# Altium PCB carrier_board.PcbDoc (part 12 of 18)
Units mm, origin at the board's own origin, x right, y up, seen from the top; angles counter-clockwise.
Board outline 146 x 102 mm, 20 copper layers (F.Cu, F.Mask, B.Cu, B.Mask, In1.Cu, F.SilkS, In2.Cu, B.SilkS, F.Adhes, B.Adhes, F.Paste, B.Paste, Dwgs.User, Cmts.User, Eco1.User, Eco2.User, Edge.Cuts, Margin, B.CrtYd, F.CrtYd); 256 components, 384 nets, 1262 pads, 1024 vias.
Unrouted connection lines stored in the file: 117.
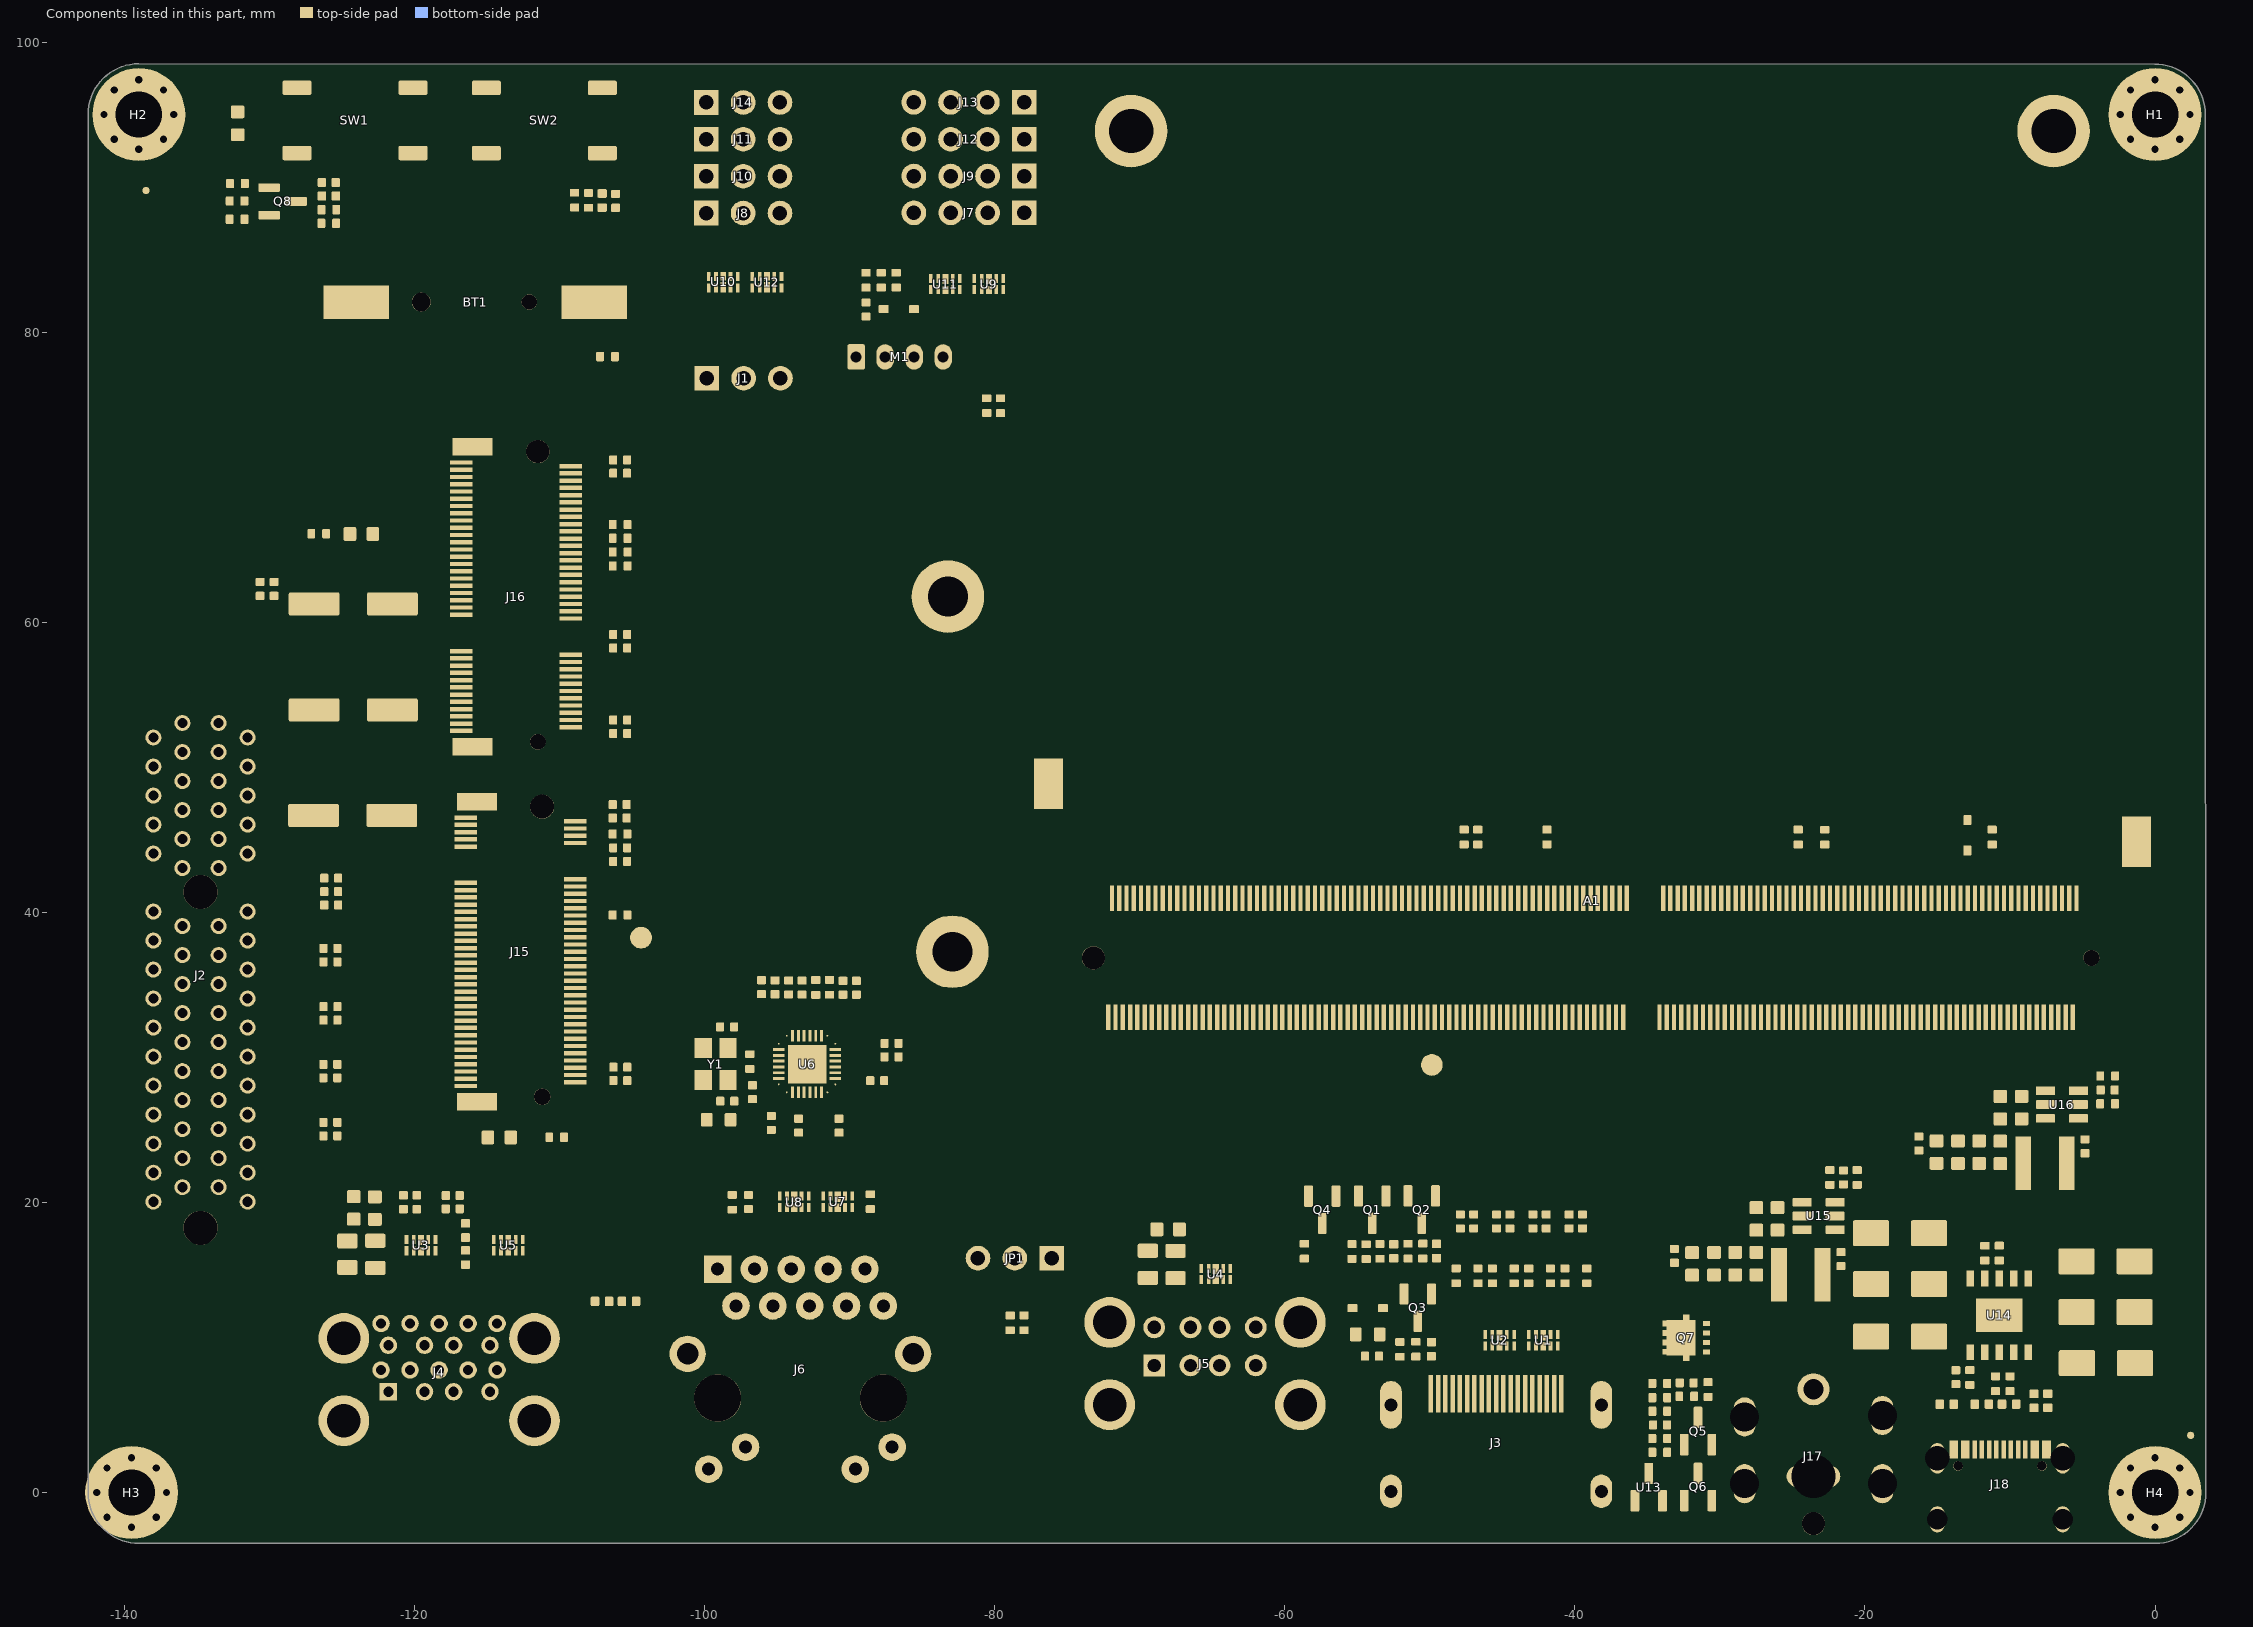
[diagram p22: the components of this part, seen from the top]

## Polygon pours and split planes (outlines as drawn) (continued)
HSIO_11_TX+ on F.Cu "F.Cu-/LattePanda Module/HSIO_11_TX+-1" (solid, remove dead copper, pour order 31897): -58.667,29.651 -58.671,29.594 -58.685,29.554 -58.729,29.5 -58.743,29.488 -58.785,29.449 -58.832,29.391 -58.666,29.279 -58.47,29.241 -58.453,29.347 -58.451,29.422 -58.457,29.486 -58.466,29.651
USB_2_P7+ on F.Cu "F.Cu-/LattePanda Module/USB_2_P7+-2" (solid, remove dead copper, pour order 31485): -115.845,53.209 -116.153,53.188 -116.444,53.163 -116.78,53.16 -116.771,53.01 -115.995,52.954 -115.99,52.982 -115.978,53.003 -115.932,53.03 -115.846,53.039 -115.845,53.039
Net-(U15-BOOST) on F.Cu "F.Cu-Net-(U15-BOOST)-1" (solid, remove dead copper, pour order 31391): -21.87,17.13 -21.864,17.059 -21.856,16.977 -21.859,16.894 -21.884,16.825 -21.909,16.801 -21.944,16.787 -21.66,16.569 -21.384,16.799 -21.417,16.809 -21.441,16.827 -21.472,16.883 -21.481,16.975 -21.475,17.067 -21.47,17.13
I2C4_SCL on F.Cu "F.Cu-/GPIO/I2C4_SCL-4" (solid, remove dead copper, pour order 31056): 23 vertices, not listed, extent -84.026,89.764 -82.864,90.926
Net-(D21-A2) on F.Cu "F.Cu-Net-(D21-A2)-4" (solid, remove dead copper, pour order 31143): 18 vertices, not listed, extent -128.101,91.859 -126.6,92.821
FAN_1_PWM on F.Cu "F.Cu-/Fan_Temp/FAN_1_PWM-2" (solid, remove dead copper, pour order 31572): -79.96,75.54 -80.045,75.546 -80.146,75.567 -80.211,75.593 -80.267,75.631 -80.295,75.662 -80.313,75.7 -80.551,75.44 -80.313,75.18 -80.274,75.242 -80.199,75.292 -80.083,75.328 -79.96,75.34
HSO+ on F.Cu "F.Cu-/Gigabit Ethernet/HSO+" (solid, remove dead copper, pour order 31537): -89.774,33.814 -89.722,33.897 -89.677,33.94 -89.621,33.979 -89.56,34.009 -89.491,34.03 -89.382,34.04 -89.535,34.321 -89.845,34.356 -89.836,34.249 -89.859,34.088 -89.922,33.876 -89.944,33.814
Net-(D26-A) on F.Cu "F.Cu-Net-(D26-A)-5" (solid, remove dead copper, pour order 31080): 19 vertices, not listed, extent -86.138,78.289 -84.962,79.653
DDC_SDA on F.Cu "F.Cu-/HDMI/DDC_SDA-3" (solid, remove dead copper, pour order 31264): -50.732,10.775 -50.727,10.853 -50.708,10.947 -50.682,11.024 -50.644,11.092 -50.609,11.131 -50.567,11.159 -50.546,11.168 -50.835,11.813 -51.124,11.168 -51.056,11.127 -51,11.049 -50.957,10.93 -50.938,10.775
SOC_UART2_TX on F.Cu "F.Cu-/GPIO/SOC_UART2_TX-4" (solid, remove dead copper, pour order 32133): -95.125,82.615 -95.125,82.63 -95.121,82.7 -95.106,82.728 -95.075,82.74 -95.2,83.053 -95.325,82.74 -95.304,82.735 -95.289,82.723 -95.275,82.678 -95.275,82.63 -95.275,82.615
Net-(Q5-G) on F.Cu "F.Cu-Net-(Q5-G)-3" (solid, remove dead copper, pour order 31470): -33.767,5.252 -33.777,5.11 -33.797,5.029 -33.831,4.956 -33.861,4.92 -33.899,4.894 -33.919,4.886 -33.65,4.661 -33.381,4.886 -33.438,4.924 -33.48,4.997 -33.506,5.112 -33.513,5.252
CON_USB2_D_P on F.Cu "F.Cu-/USB2.0&USB3.0/CON_USB2_D_P-4" (solid, remove dead copper, pour order 32025): -65.279,14.242 -65.279,14.248 -65.27,14.322 -65.247,14.354 -65.202,14.367 -65.25,14.681 -65.375,14.697 -65.387,14.558 -65.417,14.423 -65.439,14.326 -65.449,14.242
I2C3_SCL on F.Cu "F.Cu-/GPIO/I2C3_SCL-6" (solid, remove dead copper, pour order 32138): -82.825,83.27 -82.825,83.285 -82.821,83.355 -82.806,83.383 -82.775,83.395 -82.9,83.708 -83.025,83.395 -83.004,83.39 -82.989,83.378 -82.975,83.333 -82.975,83.285 -82.975,83.27
DDC_SCL on F.Cu "F.Cu-/HDMI/DDC_SCL-6" (solid, remove dead copper, pour order 31594): -50.685,17.7 -50.685,17.676 -50.686,17.59 -50.696,17.493 -50.726,17.409 -50.751,17.379 -50.786,17.36 -50.485,17.159 -50.249,17.42 -50.289,17.426 -50.324,17.44 -50.379,17.492 -50.417,17.577 -50.435,17.687 -50.435,17.7
+15V on F.Cu "F.Cu-+15V-5" (solid, remove dead copper, pour order 31890): -12.85,7.336 -12.855,7.235 -12.867,7.165 -12.88,7.12 -12.916,6.979 -12.72,6.939 -12.524,6.979 -12.563,7.093 -12.593,7.144 -12.633,7.219 -12.645,7.269 -12.65,7.336
+15V on F.Cu "F.Cu-+15V-4" (solid, remove dead copper, pour order 31715): -12.649,7.011 -12.649,7.046 -12.638,7.085 -12.617,7.121 -12.584,7.153 -12.546,7.174 -12.497,7.188 -12.49,7.19 -12.771,7.421 -13.015,7.166 -12.947,7.144 -12.882,7.084 -12.824,6.982 -12.791,6.869
GND on F.Cu "F.Cu-GND-189" (solid, remove dead copper, pour order 31712): -83.25,81.944 -83.244,82.093 -83.224,82.205 -83.224,82.207 -83.204,82.301 -83.4,82.341 -83.596,82.301 -83.576,82.207 -83.556,82.094 -83.55,81.944
Net-(D9-K) on F.Cu "F.Cu-Net-(D9-K)-1" (solid, remove dead copper, pour order 31238): 17 vertices, not listed, extent -115.055,24.278 -114.132,25.178
DDC_SDA on F.Cu "F.Cu-/HDMI/DDC_SDA-2" (solid, remove dead copper, pour order 31326): -48.533,8.255 -48.531,8.227 -48.531,8.148 -48.546,8.117 -48.58,8.105 -48.43,6.804 -48.28,8.105 -48.303,8.11 -48.319,8.122 -48.332,8.167 -48.329,8.227 -48.327,8.255
GND on F.Cu "F.Cu-GND-188" (solid, remove dead copper, pour order 31802): -62.815,41.664 -62.81,41.745 -62.798,41.802 -62.774,41.864 -62.748,41.928 -62.724,42.021 -62.92,42.061 -63.116,42.021 -63.076,41.893 -63.06,41.861 -63.029,41.783 -63.015,41.664
GND on F.Cu "F.Cu-GND-187" (solid, remove dead copper, pour order 31744): -116.166,53.91 -116.083,53.905 -116.023,53.893 -115.964,53.871 -115.9,53.847 -115.809,53.824 -115.769,54.02 -115.809,54.216 -115.934,54.176 -115.97,54.158 -116.047,54.124 -116.166,54.11
TMDS_CK+ on F.Cu "F.Cu-/HDMI/TMDS_CK+-7" (solid, remove dead copper, pour order 32096): -45.793,10.547 -45.788,10.515 -45.78,10.454 -45.79,10.431 -45.815,10.422 -45.69,10.109 -45.565,10.422 -45.585,10.427 -45.596,10.44 -45.599,10.482 -45.592,10.515 -45.587,10.547
CON_USB4_SSTX_N on F.Cu "F.Cu-/USB2.0&USB3.0/CON_USB4_SSTX_N-5" (solid, remove dead copper, pour order 31210): 18 vertices, not listed, extent -121.13,11.533 -120.183,12.48
GND on F.Cu "F.Cu-GND-186" (solid, remove dead copper, pour order 31170): 20 vertices, not listed, extent -118.301,7.862 -117.254,8.949
Net-(U6-CKXTAL1) on F.Cu "F.Cu-Net-(U6-CKXTAL1)-5" (solid, remove dead copper, pour order 31448): -97.463,31.704 -97.564,31.833 -97.613,31.922 -97.654,32.018 -97.677,32.099 -97.686,32.179 -97.685,32.216 -97.966,32.1 -98.051,31.79 -97.945,31.79 -97.813,31.753 -97.667,31.675 -97.569,31.598
I2C5_SCL on F.Cu "F.Cu-/GPIO/I2C5_SCL-4" (solid, remove dead copper, pour order 31041): 18 vertices, not listed, extent -86.918,90.053 -85.569,91.467
SOC_UART0_TX on F.Cu "F.Cu-/GPIO/SOC_UART0_TX-4" (solid, remove dead copper, pour order 32126): -96.625,82.615 -96.625,82.63 -96.621,82.7 -96.606,82.728 -96.575,82.74 -96.7,83.053 -96.825,82.74 -96.804,82.735 -96.789,82.723 -96.775,82.678 -96.775,82.63 -96.775,82.615
CON_USB1_D_N on F.Cu "F.Cu-/USB2.0&USB3.0/CON_USB1_D_N-3" (solid, remove dead copper, pour order 32053): -64.051,15.017 -64.067,15.131 -64.083,15.198 -64.113,15.333 -64.125,15.472 -64.25,15.456 -64.298,15.142 -64.269,15.138 -64.248,15.125 -64.226,15.083 -64.221,15.023 -64.221,15.017
HSIO_3_TX+ on F.Cu "F.Cu-/LattePanda Module/HSIO_3_TX+-2" (solid, remove dead copper, pour order 31971): -64.466,38.797 -64.457,38.959 -64.451,39.058 -64.47,39.199 -64.666,39.161 -64.832,39.049 -64.766,38.977 -64.723,38.948 -64.689,38.924 -64.661,38.896 -64.643,38.856 -64.636,38.797
GND on F.Cu "F.Cu-GND-185" (solid, remove dead copper, pour order 31344): -42.83,5.355 -42.832,5.381 -42.831,5.461 -42.815,5.492 -42.78,5.505 -42.93,6.806 -43.08,5.505 -43.057,5.5 -43.041,5.488 -43.027,5.443 -43.028,5.381 -43.03,5.355
TMDS_D2+ on F.Cu "F.Cu-/HDMI/TMDS_D2+-7" (solid, remove dead copper, pour order 32086): -41.077,9.673 -41.082,9.705 -41.09,9.766 -41.08,9.789 -41.055,9.797 -41.18,10.111 -41.305,9.797 -41.285,9.793 -41.274,9.78 -41.271,9.738 -41.278,9.705 -41.283,9.673
Net-(D11-A2) on F.Cu "F.Cu-Net-(D11-A2)-3" (solid, remove dead copper, pour order 31719): -11.04,3.725 -11.038,3.699 -11.039,3.619 -11.055,3.588 -11.09,3.575 -10.94,2.954 -10.79,3.575 -10.813,3.58 -10.829,3.592 -10.843,3.637 -10.842,3.699 -10.84,3.725
Net-(Q4-D) on F.Cu "F.Cu-Net-(Q4-D)-8" (solid, remove dead copper, pour order 31735): -43.79,15.538 -43.651,15.449 -43.572,15.381 -43.508,15.309 -43.483,15.266 -43.469,15.225 -43.185,15.449 -43.422,15.71 -43.449,15.641 -43.48,15.588 -43.511,15.554 -43.542,15.536 -43.584,15.538
MDI2+ on F.Cu "F.Cu-/Gigabit Ethernet/MDI2+-1" (solid, remove dead copper, pour order 32115): -92.186,27.107 -92.205,27.258 -92.228,27.419 -92.235,27.6 -92.335,27.591 -92.361,27.19 -92.338,27.188 -92.322,27.178 -92.305,27.14 -92.302,27.109 -92.302,27.107
{\P\W\R\_\L\E\D\}\{\s\l\a\s\h\}\{PSON} on F.Cu "F.Cu-/~{PWR_LED}{slash}~{PSON}-5" (solid, remove dead copper, pour order 31635): -58.55,15.59 -58.544,15.66 -58.525,15.743 -58.499,15.803 -58.462,15.852 -58.429,15.877 -58.39,15.891 -58.38,15.893 -58.65,16.131 -58.92,15.893 -58.855,15.866 -58.803,15.807 -58.765,15.709 -58.75,15.59
+3V3 on F.Cu "F.Cu-+3V3-77" (solid, remove dead copper, pour order 31565): -91.975,35.23 -91.881,35.223 -91.77,35.199 -91.709,35.173 -91.658,35.137 -91.622,35.08 -91.384,35.34 -91.622,35.599 -91.661,35.534 -91.735,35.482 -91.85,35.444 -91.975,35.43
+5V on F.Cu "F.Cu-+5V-12" (solid, remove dead copper, pour order 31182): 20 vertices, not listed, extent -69.762,16.666 -68.763,17.642
SOC_UART2_TX on F.Cu "F.Cu-/GPIO/SOC_UART2_TX-3" (solid, remove dead copper, pour order 32012): -95.275,82.438 -95.28,82.328 -95.293,82.253 -95.302,82.218 -95.332,82.091 -95.136,82.051 -94.97,82.163 -95.051,82.259 -95.105,82.326 -95.12,82.372 -95.125,82.438
+3V3 on F.Cu "F.Cu-+3V3-76" (solid, remove dead copper, pour order 31827): -53.12,18.996 -53.125,18.918 -53.137,18.862 -53.163,18.797 -53.191,18.733 -53.216,18.639 -53.02,18.599 -52.824,18.639 -52.865,18.771 -52.877,18.797 -52.907,18.876 -52.92,18.996
+3V3 on F.Cu "F.Cu-+3V3-75" (solid, remove dead copper, pour order 31366): -106.49,28.99 -106.485,28.91 -106.478,28.814 -106.482,28.716 -106.508,28.63 -106.534,28.596 -106.57,28.57 -106.29,28.399 -106.01,28.57 -106.064,28.617 -106.094,28.693 -106.102,28.808 -106.095,28.91 -106.09,28.99
GND on F.Cu "F.Cu-GND-184" (solid, remove dead copper, pour order 31741): -32.209,34.369 -32.145,34.427 -32.093,34.461 -32.039,34.488 -31.979,34.516 -31.899,34.564 -32.009,34.731 -32.176,34.841 -32.235,34.727 -32.248,34.684 -32.278,34.605 -32.351,34.511
VPullup on F.Cu "F.Cu-VPullup-7" (solid, remove dead copper, pour order 31612): -13.49,46.28 -13.429,46.275 -13.356,46.256 -13.298,46.231 -13.248,46.193 -13.222,46.16 -13.207,46.119 -13.204,46.094 -12.939,46.36 -13.192,46.644 -13.215,46.581 -13.273,46.532 -13.37,46.495 -13.49,46.48
CON_USB3_SSRX_N on F.Cu "F.Cu-/USB2.0&USB3.0/CON_USB3_SSRX_N-4" (solid, remove dead copper, pour order 32060): -114.229,17.107 -114.213,16.994 -114.197,16.927 -114.167,16.792 -114.155,16.653 -114.03,16.669 -113.982,16.983 -114.011,16.987 -114.032,17 -114.054,17.042 -114.059,17.102 -114.059,17.107
GND on F.Cu "F.Cu-GND-183" (solid, remove dead copper, pour order 31790): -11.065,33.794 -11.06,33.875 -11.048,33.932 -11.024,33.994 -10.998,34.058 -10.974,34.151 -11.17,34.191 -11.366,34.151 -11.326,34.023 -11.31,33.991 -11.279,33.913 -11.265,33.794
LED2_ACT on F.Cu "F.Cu-/Gigabit Ethernet/LED2_ACT" (solid, remove dead copper, pour order 32019): -95.839,31.015 -95.902,31.01 -95.949,30.998 -96.018,30.958 -96.079,30.921 -96.173,30.89 -96.135,30.694 -95.967,30.583 -95.936,30.659 -95.93,30.747 -95.928,30.794 -95.917,30.831 -95.891,30.856 -95.839,30.865
+3V3 on F.Cu "F.Cu-+3V3-74" (solid, remove dead copper, pour order 31862): -23.975,29.52 -23.917,29.572 -23.868,29.603 -23.804,29.63 -23.74,29.656 -23.655,29.705 -23.765,29.872 -23.932,29.982 -23.997,29.86 -24.007,29.833 -24.041,29.755 -24.117,29.662
REFCLK2- on F.Cu "F.Cu-/LattePanda Module/REFCLK2--2" (solid, remove dead copper, pour order 31226): 20 vertices, not listed, extent -131.607,37.943 -130.762,38.863
+12VA on F.Cu "F.Cu-+12VA-1" (solid, remove dead copper, pour order 31035): 22 vertices, not listed, extent -127.845,61.259 -126.228,62.56
GND on F.Cu "F.Cu-GND-182" (solid, remove dead copper, pour order 31798): -64.315,41.674 -64.31,41.755 -64.298,41.812 -64.274,41.874 -64.248,41.938 -64.224,42.031 -64.42,42.071 -64.616,42.031 -64.576,41.903 -64.56,41.871 -64.529,41.793 -64.515,41.674
GND on F.Cu "F.Cu-GND-181" (solid, remove dead copper, pour order 32164): 19 vertices, not listed, extent -16.116,42.34 -15.815,42.482
Net-(D11-A2) on F.Cu "F.Cu-Net-(D11-A2)-2" (solid, remove dead copper, pour order 31608): -10.435,6.697 -10.484,6.638 -10.62,6.484 -10.692,6.425 -10.758,6.399 -10.556,6.089 -10.26,6.262 -10.297,6.286 -10.324,6.314 -10.349,6.38 -10.343,6.459 -10.304,6.541 -10.293,6.555
CON_USB3_SSTX_N on F.Cu "F.Cu-/USB2.0&USB3.0/CON_USB3_SSTX_N-5" (solid, remove dead copper, pour order 31956): -120.249,16.173 -120.258,16.011 -120.264,15.912 -120.245,15.771 -120.049,15.809 -119.883,15.921 -119.949,15.993 -119.992,16.022 -120.026,16.046 -120.054,16.074 -120.072,16.114 -120.079,16.173
GND on F.Cu "F.Cu-GND-180" (solid, remove dead copper, pour order 31809): -15.566,34.18 -15.488,34.175 -15.432,34.163 -15.367,34.137 -15.303,34.109 -15.209,34.084 -15.169,34.28 -15.209,34.476 -15.341,34.435 -15.367,34.423 -15.446,34.393 -15.566,34.38
HPD on F.Cu "F.Cu-/HDMI/HPD-5" (solid, remove dead copper, pour order 31399): -50.234,8.123 -50.153,8.014 -50.098,7.874 -50.066,7.685 -50.058,7.407 -50.069,7.075 -50.08,6.797 -49.929,6.804 -49.978,8.105 -49.995,8.123 -50.017,8.192 -50.035,8.255 -50.058,8.299
CON_USB3_D_N on F.Cu "F.Cu-/USB2.0&USB3.0/CON_USB3_D_N-4" (solid, remove dead copper, pour order 31406): -105.919,12.632 -105.882,12.711 -105.846,12.754 -105.799,12.794 -105.744,12.826 -105.682,12.85 -105.62,12.862 -105.552,12.864 -105.536,12.862 -105.695,13.181 -105.99,13.258 -105.991,13.119 -106.027,12.901 -106.062,12.747 -106.089,12.632
GbE_PCIe_RX+ on F.Cu "F.Cu-/Gigabit Ethernet/GbE_PCIe_RX+-2" (solid, remove dead copper, pour order 31929): -89.774,38.277 -89.769,38.328 -89.756,38.365 -89.712,38.411 -89.687,38.428 -89.633,38.466 -89.578,38.529 -89.744,38.641 -89.94,38.679 -89.956,38.574 -89.958,38.5 -89.953,38.439 -89.944,38.277
GND on F.Cu "F.Cu-GND-179" (solid, remove dead copper, pour order 31842): -98.825,32.884 -98.82,32.962 -98.808,33.018 -98.782,33.083 -98.754,33.147 -98.729,33.241 -98.925,33.281 -99.121,33.241 -99.08,33.109 -99.068,33.083 -99.038,33.004 -99.025,32.884
HSIO_1_TX- on F.Cu "F.Cu-/LattePanda Module/HSIO_1_TX--2" (solid, remove dead copper, pour order 31906): -115.793,19.799 -115.742,19.794 -115.705,19.781 -115.659,19.737 -115.642,19.712 -115.604,19.658 -115.541,19.603 -115.429,19.769 -115.391,19.965 -115.496,19.981 -115.57,19.983 -115.631,19.978 -115.793,19.969
CON_USB3_SSTX_P on F.Cu "F.Cu-/USB2.0&USB3.0/CON_USB3_SSTX_P-5" (solid, remove dead copper, pour order 31515): -120.353,19.027 -120.425,19.251 -120.453,19.381 -120.461,19.504 -120.452,19.568 -120.762,19.533 -120.915,19.252 -120.792,19.239 -120.676,19.191 -120.578,19.112 -120.523,19.027
Net-(U14-VDD) on F.Cu "F.Cu-Net-(U14-VDD)-3" (solid, remove dead copper, pour order 31598): -12.865,8.98 -12.873,8.881 -12.886,8.824 -12.908,8.77 -12.936,8.731 -12.972,8.702 -13.027,8.686 -12.77,8.439 -12.487,8.667 -12.544,8.695 -12.584,8.755 -12.609,8.856 -12.615,8.98
TMDS_D0- on F.Cu "F.Cu-/HDMI/TMDS_D0--7" (solid, remove dead copper, pour order 32085): -44.587,10.448 -44.592,10.48 -44.6,10.541 -44.59,10.564 -44.565,10.572 -44.69,10.886 -44.815,10.572 -44.795,10.568 -44.784,10.555 -44.781,10.513 -44.788,10.48 -44.793,10.448
GND on F.Cu "F.Cu-GND-178" (solid, remove dead copper, pour order 31888): -47.065,33.644 -47.06,33.731 -47.048,33.792 -47.028,33.849 -46.984,34.001 -47.18,34.041 -47.376,34.001 -47.337,33.879 -47.315,33.839 -47.28,33.762 -47.265,33.644
HSIO_8_TX+ on F.Cu "F.Cu-/LattePanda Module/HSIO_8_TX+-2" (solid, remove dead copper, pour order 31896): -63.191,29.651 -63.196,29.594 -63.209,29.554 -63.254,29.5 -63.267,29.488 -63.31,29.449 -63.356,29.391 -63.19,29.279 -62.994,29.241 -62.978,29.347 -62.976,29.422 -62.981,29.486 -62.99,29.651
TMDS_CK- on F.Cu "F.Cu-/HDMI/TMDS_CK--7" (solid, remove dead copper, pour order 31609): -47.485,17.779 -47.526,17.879 -47.567,18.002 -47.592,18.133 -47.593,18.197 -47.584,18.258 -47.894,18.211 -48.038,17.93 -47.96,17.929 -47.89,17.918 -47.829,17.9 -47.778,17.874 -47.737,17.843 -47.707,17.808 -47.69,17.779
GND on F.Cu "F.Cu-GND-177" (solid, remove dead copper, pour order 31352): -125.06,41.76 -125.065,41.84 -125.072,41.936 -125.068,42.034 -125.042,42.12 -125.016,42.154 -124.98,42.18 -125.26,42.351 -125.54,42.18 -125.486,42.133 -125.455,42.057 -125.448,41.942 -125.455,41.84 -125.46,41.76
Net-(U13-REF) on F.Cu "F.Cu-Net-(U13-REF)-3" (solid, remove dead copper, pour order 31268): -34.06,0.473 -34.065,0.397 -34.083,0.306 -34.11,0.229 -34.148,0.159 -34.183,0.119 -34.225,0.089 -34.249,0.08 -33.96,-0.566 -33.671,0.08 -33.739,0.121 -33.796,0.199 -33.84,0.319 -33.86,0.473
Net-(U10-NC-Pad6) on F.Cu "F.Cu-Net-(U10-NC-Pad6)-1" (solid, remove dead copper, pour order 32109): -97.61,83.393 -97.615,83.424 -97.62,83.486 -97.611,83.508 -97.585,83.517 -97.71,83.831 -97.835,83.517 -97.815,83.513 -97.804,83.5 -97.8,83.457 -97.805,83.424 -97.81,83.393
GND on F.Cu "F.Cu-GND-176" (solid, remove dead copper, pour order 31757): -61.515,39.666 -61.52,39.585 -61.532,39.528 -61.556,39.466 -61.582,39.402 -61.606,39.309 -61.41,39.269 -61.214,39.309 -61.254,39.437 -61.27,39.469 -61.301,39.547 -61.315,39.666
+12V on F.Cu "F.Cu-+12V-10" (solid, remove dead copper, pour order 32073): -30.82,9.35 -30.82,9.366 -30.813,9.466 -30.79,9.508 -30.771,9.52 -30.745,9.525 -30.92,9.701 -31.095,9.525 -31.069,9.52 -31.049,9.507 -31.026,9.461 -31.02,9.366 -31.02,9.35
GND on F.Cu "F.Cu-GND-175" (solid, remove dead copper, pour order 31158): 20 vertices, not listed, extent -7.329,2.079 -6.369,3.255
PWR_EN on F.Cu "F.Cu-/PSU/PWR_EN-9" (solid, remove dead copper, pour order 31845): -24.28,20.664 -24.275,20.742 -24.263,20.798 -24.237,20.863 -24.209,20.927 -24.184,21.021 -24.38,21.061 -24.576,21.021 -24.535,20.889 -24.523,20.863 -24.493,20.784 -24.48,20.664
HPD on F.Cu "F.Cu-/HDMI/HPD-4" (solid, remove dead copper, pour order 31728): -49.966,8.208 -50.031,8.279 -50.069,8.335 -50.093,8.381 -50.169,8.511 -50.336,8.401 -50.446,8.234 -50.316,8.158 -50.239,8.114 -50.143,8.031
SOC_UART2_RX on F.Cu "F.Cu-/GPIO/SOC_UART2_RX-4" (solid, remove dead copper, pour order 32003): -84.064,79.735 -84.132,79.74 -84.183,79.752 -84.257,79.79 -84.322,79.826 -84.421,79.856 -84.461,79.66 -84.421,79.464 -84.305,79.503 -84.257,79.53 -84.182,79.569 -84.131,79.581 -84.064,79.585
+12V on F.Cu "F.Cu-+12V-9" (solid, remove dead copper, pour order 31830): -32.91,6.239 -32.915,6.161 -32.927,6.104 -32.953,6.04 -32.981,5.976 -33.006,5.882 -32.81,5.841 -32.614,5.882 -32.655,6.013 -32.667,6.04 -32.697,6.119 -32.71,6.239
SOC_UART2_TX on F.Cu "F.Cu-/GPIO/SOC_UART2_TX-2" (solid, remove dead copper, pour order 32136): -95.275,83.49 -95.275,83.475 -95.279,83.405 -95.294,83.377 -95.325,83.365 -95.2,83.052 -95.075,83.365 -95.096,83.37 -95.111,83.382 -95.125,83.427 -95.125,83.475 -95.125,83.49
I2C5_SCL on F.Cu "F.Cu-/GPIO/I2C5_SCL-3" (solid, remove dead copper, pour order 32117): -84.475,83.37 -84.475,83.355 -84.479,83.285 -84.494,83.257 -84.525,83.245 -84.4,82.932 -84.275,83.245 -84.296,83.25 -84.311,83.262 -84.325,83.307 -84.325,83.355 -84.325,83.37
VDC on F.Cu "F.Cu-VDC-3" (solid, remove dead copper, pour order 30964): -23.99,18.75 -29.445,18.75 -29.445,21.035 -29.335,21.145 -25.875,21.145 -25.555,20.825 -25.555,19.365 -25.54,19.35 -23.99,19.35
CON_USB4_SSRX_P on F.Cu "F.Cu-/USB2.0&USB3.0/CON_USB4_SSRX_P-4" (solid, remove dead copper, pour order 31214): 18 vertices, not listed, extent -116.417,11.533 -115.47,12.48
Net-(U6-RSET) on F.Cu "F.Cu-Net-(U6-RSET)-1" (solid, remove dead copper, pour order 32154): -95.385,28.465 -95.354,28.467 -95.286,28.47 -95.256,28.461 -95.235,28.44 -94.884,28.54 -95.235,28.64 -95.267,28.613 -95.327,28.609 -95.354,28.612 -95.385,28.615
USB_2_P7- on F.Cu "F.Cu-/LattePanda Module/USB_2_P7--2" (solid, remove dead copper, pour order 31937): -104.447,49.321 -104.498,49.326 -104.535,49.339 -104.581,49.383 -104.598,49.408 -104.636,49.462 -104.699,49.517 -104.811,49.351 -104.849,49.155 -104.744,49.139 -104.67,49.137 -104.609,49.142 -104.447,49.151
HSIO_2_RX- on F.Cu "F.Cu-/LattePanda Module/HSIO_2_RX--2" (solid, remove dead copper, pour order 31481): -115.545,38.229 -115.853,38.208 -116.144,38.183 -116.48,38.18 -116.471,38.03 -115.695,37.974 -115.69,38.002 -115.678,38.023 -115.632,38.05 -115.546,38.059 -115.545,38.059
+3V3 on F.Cu "F.Cu-+3V3-73" (solid, remove dead copper, pour order 31840): -88.48,27.147 -88.475,27.225 -88.463,27.281 -88.437,27.345 -88.409,27.41 -88.384,27.504 -88.58,27.544 -88.776,27.504 -88.735,27.372 -88.723,27.345 -88.693,27.267 -88.68,27.147
CON_USB4_SSTX_P on F.Cu "F.Cu-/USB2.0&USB3.0/CON_USB4_SSTX_P-5" (solid, remove dead copper, pour order 32050): -118.851,16.232 -118.867,16.346 -118.883,16.413 -118.913,16.548 -118.925,16.687 -119.05,16.671 -119.098,16.358 -119.069,16.353 -119.048,16.34 -119.026,16.298 -119.021,16.238 -119.021,16.232
CON_USB3_SSTX_N on F.Cu "F.Cu-/USB2.0&USB3.0/CON_USB3_SSTX_N-4" (solid, remove dead copper, pour order 32062): -120.249,17.107 -120.233,16.994 -120.217,16.927 -120.187,16.792 -120.175,16.653 -120.05,16.669 -120.002,16.983 -120.031,16.987 -120.052,17 -120.074,17.042 -120.079,17.102 -120.079,17.107
CON_USB2_D_N on F.Cu "F.Cu-/USB2.0&USB3.0/CON_USB2_D_N-4" (solid, remove dead copper, pour order 32032): -65.721,15.893 -65.721,15.887 -65.73,15.813 -65.753,15.781 -65.798,15.767 -65.75,15.454 -65.625,15.438 -65.613,15.577 -65.583,15.712 -65.561,15.809 -65.551,15.893
Net-(Q8-G) on F.Cu "F.Cu-Net-(Q8-G)-3" (solid, remove dead copper, pour order 31614): -131.938,88.476 -131.773,88.627 -131.674,88.693 -131.627,88.713 -131.584,88.72 -131.719,89.041 -131.99,89.107 -131.949,88.982 -131.942,88.843 -131.972,88.705 -131.998,88.645 -132.031,88.596 -132.044,88.582
DDI_B_DDC_SCL on F.Cu "F.Cu-/HDMI/DDI_B_DDC_SCL-2" (solid, remove dead copper, pour order 31626): -51.604,17.69 -51.61,17.615 -51.632,17.525 -51.658,17.469 -51.694,17.423 -51.727,17.4 -51.766,17.388 -51.77,17.387 -51.5,17.149 -51.23,17.387 -51.295,17.413 -51.345,17.473 -51.381,17.57 -51.396,17.69
DDI_B_TX3+ on F.Cu "F.Cu-/HDMI/DDI_B_TX3+" (solid, remove dead copper, pour order 31455): -47.383,19.683 -47.361,19.612 -47.294,19.37 -47.276,19.248 -47.284,19.142 -46.974,19.169 -46.816,19.45 -46.933,19.463 -47.039,19.511 -47.126,19.588 -47.157,19.635 -47.177,19.68 -47.178,19.683
PWR_EN on F.Cu "F.Cu-/PSU/PWR_EN-8" (solid, remove dead copper, pour order 31451): -7.648,28.297 -7.653,28.24 -7.67,28.17 -7.696,28.107 -7.734,28.052 -7.768,28.023 -7.81,28.003 -7.853,27.998 -7.558,27.697 -7.252,27.998 -7.322,28.016 -7.378,28.068 -7.423,28.158 -7.447,28.276 -7.448,28.297
GND on F.Cu "F.Cu-GND-174" (solid, remove dead copper, pour order 31672): -115.845,54.11 -115.871,54.108 -115.951,54.109 -115.982,54.125 -115.995,54.16 -116.771,54.01 -115.995,53.86 -115.99,53.883 -115.978,53.899 -115.933,53.913 -115.871,53.912 -115.845,53.91
HSI+ on F.Cu "F.Cu-/Gigabit Ethernet/HSI+-1" (solid, remove dead copper, pour order 31541): -88.095,30.278 -88.013,30.225 -87.969,30.18 -87.931,30.124 -87.9,30.062 -87.879,29.993 -87.87,29.885 -87.589,30.037 -87.553,30.348 -87.66,30.339 -87.82,30.362 -88.032,30.425 -88.095,30.448
CC2 on F.Cu "F.Cu-/PSU/CC2-5" (solid, remove dead copper, pour order 31880): -8.84,14.186 -8.845,14.113 -8.857,14.059 -8.888,13.99 -8.919,13.925 -8.946,13.829 -8.75,13.789 -8.554,13.829 -8.595,13.969 -8.601,13.984 -8.629,14.064 -8.64,14.186
+3V3 on F.Cu "F.Cu-+3V3-72" (solid, remove dead copper, pour order 31652): -107.995,28.88 -108.021,28.878 -108.101,28.879 -108.132,28.895 -108.145,28.93 -108.921,28.78 -108.145,28.63 -108.14,28.653 -108.128,28.669 -108.083,28.683 -108.021,28.682 -107.995,28.68
{\P\L\T\_\R\S\T\}\ on F.Cu "F.Cu-/~{PLT_RST}-8" (solid, remove dead copper, pour order 31990): -92.197,33.017 -92.145,33.062 -92.101,33.089 -92.022,33.115 -91.95,33.135 -91.859,33.184 -91.969,33.351 -92.136,33.461 -92.191,33.351 -92.205,33.298 -92.232,33.218 -92.259,33.174 -92.303,33.123
FAN_1_PWM on F.Cu "F.Cu-/Fan_Temp/FAN_1_PWM-1" (solid, remove dead copper, pour order 32005): -78.836,74.574 -78.726,74.458 -78.648,74.347 -78.616,74.299 -78.449,74.409 -78.411,74.606 -78.503,74.621 -78.597,74.642 -78.641,74.668 -78.694,74.716
CON_USB3_SSRX_N on F.Cu "F.Cu-/USB2.0&USB3.0/CON_USB3_SSRX_N-3" (solid, remove dead copper, pour order 32043): -114.059,16.232 -114.059,16.238 -114.05,16.312 -114.027,16.344 -113.982,16.358 -114.03,16.671 -114.155,16.687 -114.167,16.548 -114.197,16.413 -114.219,16.316 -114.229,16.232
CON_USB3_SSTX_P on F.Cu "F.Cu-/USB2.0&USB3.0/CON_USB3_SSTX_P-4" (solid, remove dead copper, pour order 32067): -120.351,16.232 -120.367,16.346 -120.383,16.413 -120.413,16.548 -120.425,16.687 -120.55,16.671 -120.598,16.358 -120.569,16.353 -120.548,16.34 -120.526,16.298 -120.521,16.238 -120.521,16.232
PCIE30_TX3_N on F.Cu "F.Cu-/PCIe x4/PCIE30_TX3_N-1" (solid, remove dead copper, pour order 31550): -126.783,24.834 -126.701,24.78 -126.658,24.733 -126.619,24.677 -126.589,24.614 -126.569,24.545 -126.56,24.439 -126.279,24.59 -126.242,24.9 -126.348,24.891 -126.508,24.915 -126.716,24.979 -126.783,25.004
+12V on F.Cu "F.Cu-+12V-8" (solid, remove dead copper, pour order 31629): -33.1,7.662 -33.19,7.669 -33.296,7.694 -33.35,7.72 -33.393,7.755 -33.42,7.81 -33.641,7.522 -33.391,7.27 -33.367,7.342 -33.311,7.4 -33.219,7.443 -33.1,7.462
Net-(J6-PadL3) on F.Cu "F.Cu-Net-(J6-PadL3)-1" (solid, remove dead copper, pour order 31427): -98.461,18.988 -98.384,19.057 -98.284,19.129 -98.197,19.177 -98.105,19.213 -98.041,19.227 -97.978,19.23 -98.089,19.501 -98.41,19.562 -98.408,19.469 -98.442,19.357 -98.518,19.229 -98.602,19.129
PCIE30_TX1_N on F.Cu "F.Cu-/PCIe x4/PCIE30_TX1_N-1" (solid, remove dead copper, pour order 31194): 21 vertices, not listed, extent -138.001,31.511 -136.961,32.507
Net-(U13-K) on F.Cu "F.Cu-Net-(U13-K)-3" (solid, remove dead copper, pour order 31496): -34.533,6.933 -34.531,7.022 -34.515,7.129 -34.499,7.181 -34.476,7.226 -34.443,7.263 -34.4,7.286 -34.66,7.524 -34.92,7.286 -34.861,7.248 -34.819,7.177 -34.793,7.065 -34.787,6.933
VPullup on F.Cu "F.Cu-VPullup-6" (solid, remove dead copper, pour order 31576): -41.33,45.8 -41.415,45.806 -41.516,45.827 -41.581,45.853 -41.637,45.891 -41.665,45.922 -41.683,45.96 -41.921,45.7 -41.683,45.44 -41.644,45.502 -41.569,45.552 -41.453,45.588 -41.33,45.6
GND on F.Cu "F.Cu-GND-173" (solid, remove dead copper, pour order 31651): -117.395,38.93 -117.369,38.932 -117.289,38.931 -117.258,38.915 -117.245,38.88 -116.469,39.03 -117.245,39.18 -117.25,39.157 -117.262,39.141 -117.307,39.127 -117.369,39.128 -117.395,39.13
SOC_UART0_TX on F.Cu "F.Cu-/GPIO/SOC_UART0_TX-3" (solid, remove dead copper, pour order 31992): -96.625,84.634 -96.62,84.702 -96.608,84.753 -96.57,84.827 -96.534,84.892 -96.504,84.991 -96.7,85.031 -96.896,84.991 -96.857,84.875 -96.83,84.827 -96.791,84.752 -96.779,84.701 -96.775,84.634
HSIO_3_TX+ on F.Cu "F.Cu-/LattePanda Module/HSIO_3_TX+-1" (solid, remove dead copper, pour order 31531): -104.837,58.634 -105.019,58.57 -105.128,58.542 -105.237,58.524 -105.312,58.521 -105.378,58.53 -105.341,58.22 -105.06,58.069 -105.047,58.192 -104.999,58.31 -104.919,58.409 -104.837,58.464
GND on F.Cu "F.Cu-GND-172" (solid, remove dead copper, pour order 31296): -34.892,4.045 -34.821,4.129 -34.756,4.209 -34.682,4.284 -34.6,4.337 -34.556,4.351 -34.511,4.353 -34.609,4.663 -34.89,4.769 -34.895,4.676 -34.938,4.579 -35.022,4.472 -35.12,4.379 -35.175,4.328
I2C5_SDA on F.Cu "F.Cu-/GPIO/I2C5_SDA-2" (solid, remove dead copper, pour order 32143): -81.325,82.495 -81.325,82.51 -81.321,82.58 -81.306,82.608 -81.275,82.62 -81.4,82.933 -81.525,82.62 -81.504,82.615 -81.489,82.603 -81.475,82.558 -81.475,82.51 -81.475,82.495
GND on F.Cu "F.Cu-GND-171" (solid, remove dead copper, pour order 31354): -105.57,47.09 -105.565,47.01 -105.558,46.914 -105.562,46.816 -105.588,46.73 -105.614,46.696 -105.65,46.67 -105.37,46.499 -105.09,46.67 -105.144,46.717 -105.175,46.793 -105.182,46.908 -105.175,47.01 -105.17,47.09
CON_USB3_D_N on F.Cu "F.Cu-/USB2.0&USB3.0/CON_USB3_D_N-3" (solid, remove dead copper, pour order 31403): -106.089,13.728 -106.062,13.613 -106.005,13.35 -105.989,13.218 -105.99,13.102 -105.695,13.179 -105.536,13.498 -105.656,13.504 -105.766,13.546 -105.858,13.618 -105.891,13.662 -105.913,13.707 -105.919,13.728
GND on F.Cu "F.Cu-GND-170" (solid, remove dead copper, pour order 31705): -115.549,45.67 -115.589,45.662 -115.659,45.651 -115.685,45.657 -115.695,45.68 -116.471,45.53 -115.695,45.413 -115.69,45.437 -115.678,45.453 -115.632,45.469 -115.568,45.471 -115.541,45.47
Net-(J4B-VBUS2) on F.Cu "F.Cu-Net-(J4B-VBUS2)" (solid, remove dead copper, pour order 31107): 17 vertices, not listed, extent -122.919,9.381 -121.683,10.483
HSIO_3_TX- on F.Cu "F.Cu-/LattePanda Module/HSIO_3_TX--2" (solid, remove dead copper, pour order 31932): -64.194,38.797 -64.189,38.848 -64.176,38.885 -64.132,38.931 -64.107,38.948 -64.053,38.986 -63.998,39.049 -64.164,39.161 -64.36,39.199 -64.376,39.094 -64.378,39.02 -64.373,38.959 -64.364,38.797
TMDS_D1- on F.Cu "F.Cu-/HDMI/TMDS_D1--7" (solid, remove dead copper, pour order 31334): -43.533,8.255 -43.531,8.227 -43.531,8.148 -43.546,8.117 -43.58,8.105 -43.43,6.804 -43.28,8.105 -43.303,8.11 -43.319,8.122 -43.332,8.167 -43.329,8.227 -43.327,8.255
CON_USB2_D_N on F.Cu "F.Cu-/USB2.0&USB3.0/CON_USB2_D_N-3" (solid, remove dead copper, pour order 32031): -65.721,15.118 -65.721,15.112 -65.73,15.038 -65.753,15.006 -65.798,14.992 -65.75,14.679 -65.625,14.663 -65.613,14.802 -65.583,14.937 -65.561,15.034 -65.551,15.118
GND on F.Cu "F.Cu-GND-169" (solid, remove dead copper, pour order 31886): -62.065,34.384 -62.06,34.456 -62.048,34.508 -62.015,34.579 -61.982,34.644 -61.954,34.741 -62.15,34.781 -62.346,34.741 -62.302,34.589 -62.276,34.507 -62.265,34.384
Net-(D22-K) on F.Cu "F.Cu-Net-(D22-K)-1" (solid, remove dead copper, pour order 31595): -128.235,89.542 -128.245,89.468 -128.266,89.424 -128.298,89.381 -128.337,89.349 -128.383,89.324 -128.464,89.31 -128.144,89.009 -127.863,89.31 -127.932,89.328 -128.003,89.386 -128.074,89.49 -128.125,89.623 -128.129,89.648
GND on F.Cu "F.Cu-GND-168" (solid, remove dead copper, pour order 31687): -117.395,35.93 -117.369,35.932 -117.289,35.931 -117.258,35.915 -117.245,35.88 -116.469,36.03 -117.245,36.18 -117.25,36.157 -117.262,36.141 -117.307,36.127 -117.369,36.128 -117.395,36.13
CON_USB4_SSTX_P on F.Cu "F.Cu-/USB2.0&USB3.0/CON_USB4_SSTX_P-4" (solid, remove dead copper, pour order 32039): -119.021,17.882 -119.021,17.877 -119.03,17.803 -119.053,17.771 -119.098,17.758 -119.05,17.444 -118.925,17.428 -118.913,17.567 -118.883,17.702 -118.861,17.799 -118.851,17.882
GND on F.Cu "F.Cu-GND-167" (solid, remove dead copper, pour order 31683): -108.295,56.86 -108.321,56.858 -108.401,56.859 -108.432,56.875 -108.445,56.91 -109.221,56.76 -108.445,56.61 -108.44,56.633 -108.428,56.649 -108.383,56.663 -108.321,56.662 -108.295,56.66
+3V3 on F.Cu "F.Cu-+3V3-71" (solid, remove dead copper, pour order 31654): -107.995,32.38 -108.021,32.378 -108.101,32.379 -108.132,32.395 -108.145,32.43 -108.921,32.28 -108.145,32.13 -108.14,32.153 -108.128,32.169 -108.083,32.183 -108.021,32.182 -107.995,32.18
Net-(D10-A2) on F.Cu "F.Cu-Net-(D10-A2)-4" (solid, remove dead copper, pour order 31717): -10.34,2.185 -10.342,2.211 -10.341,2.291 -10.325,2.322 -10.29,2.335 -10.44,2.956 -10.59,2.335 -10.567,2.33 -10.551,2.318 -10.537,2.273 -10.538,2.211 -10.54,2.185
+3V3 on F.Cu "F.Cu-+3V3-70" (solid, remove dead copper, pour order 31620): -107.995,45.405 -108.035,45.398 -108.108,45.389 -108.134,45.4 -108.145,45.43 -108.921,45.28 -108.145,45.13 -108.14,45.152 -108.128,45.165 -108.085,45.171 -108.035,45.162 -107.995,45.155
GND on F.Cu "F.Cu-GND-166" (solid, remove dead copper, pour order 31707): -35.261,4.242 -35.16,4.167 -34.978,4.081 -34.876,4.049 -34.778,4.03 -34.706,4.026 -34.644,4.036 -34.625,4.042 -34.661,3.722 -34.93,3.594 -34.929,3.674 -34.932,3.843 -34.947,3.909 -34.978,3.959
GND on F.Cu "F.Cu-GND-165" (solid, remove dead copper, pour order 31844): -115.68,52.124 -115.675,52.202 -115.663,52.258 -115.637,52.323 -115.609,52.387 -115.584,52.481 -115.78,52.521 -115.976,52.481 -115.935,52.349 -115.923,52.323 -115.893,52.244 -115.88,52.124
{\C\L\K\R\E\Q\M\}\ on F.Cu "F.Cu-/M.2 E&M Key/~{CLKREQM}-1" (solid, remove dead copper, pour order 31673): -107.995,40.88 -108.021,40.878 -108.101,40.879 -108.132,40.895 -108.145,40.93 -108.921,40.78 -108.145,40.63 -108.14,40.653 -108.128,40.669 -108.083,40.683 -108.021,40.682 -107.995,40.68
5V_HDMI_VCC on F.Cu "F.Cu-5V_HDMI_VCC-1" (solid, remove dead copper, pour order 31222): -53.489,11.77 -53.494,11.659 -53.52,11.529 -53.548,11.467 -53.59,11.414 -53.646,11.373 -53.721,11.349 -53.758,11.346 -53.46,10.899 -53.06,10.848 -53.084,10.976 -53.078,11.152 -53.027,11.455 -52.995,11.626 -52.981,11.77
Net-(U16-FB) on F.Cu "F.Cu-Net-(U16-FB)-2" (solid, remove dead copper, pour order 31587): -3.88,27.39 -3.886,27.312 -3.905,27.219 -3.932,27.151 -3.969,27.092 -4.003,27.06 -4.044,27.038 -4.05,27.037 -3.79,26.799 -3.53,27.037 -3.59,27.076 -3.637,27.151 -3.67,27.269 -3.68,27.39
Net-(A1-{\B\I\O\S\_\S\E\L\}\)\ on F.Cu "F.Cu-Net-(A1-~{BIOS_SEL})-2" (solid, remove dead copper, pour order 31867): -39.039,38.671 -39.091,38.729 -39.122,38.778 -39.149,38.842 -39.175,38.906 -39.224,38.991 -39.391,38.881 -39.501,38.714 -39.379,38.649 -39.352,38.639 -39.274,38.605 -39.181,38.529
DDI_B_HPD on F.Cu "F.Cu-/HDMI/DDI_B_HPD-4" (solid, remove dead copper, pour order 31602): -55.485,17.668 -55.498,17.526 -55.523,17.45 -55.568,17.391 -55.596,17.374 -55.63,17.365 -55.36,17.126 -55.09,17.365 -55.124,17.374 -55.152,17.391 -55.196,17.448 -55.226,17.544 -55.235,17.668
Net-(J5-VBUS2) on F.Cu "F.Cu-Net-(J5-VBUS2)-1" (solid, remove dead copper, pour order 31044): -69.25,12.618 -69.255,12.478 -69.27,12.368 -69.291,12.291 -69.318,12.225 -69.4,12.097 -69.452,12.032 -69.624,11.799 -69,11.381 -68.376,11.799 -68.548,12.032 -68.637,12.149 -68.7,12.265 -68.737,12.411 -68.75,12.618
CON_USB3_SSTX_N on F.Cu "F.Cu-/USB2.0&USB3.0/CON_USB3_SSTX_N-3" (solid, remove dead copper, pour order 32058): -120.249,17.882 -120.233,17.769 -120.217,17.702 -120.187,17.567 -120.175,17.428 -120.05,17.444 -120.002,17.758 -120.031,17.762 -120.052,17.775 -120.074,17.817 -120.079,17.877 -120.079,17.882
Net-(U12-NC-Pad6) on F.Cu "F.Cu-Net-(U12-NC-Pad6)-1" (solid, remove dead copper, pour order 32107): -94.6,83.39 -94.605,83.421 -94.61,83.483 -94.601,83.506 -94.575,83.515 -94.7,83.828 -94.825,83.515 -94.805,83.51 -94.794,83.498 -94.79,83.455 -94.795,83.421 -94.8,83.39
{\W\A\K\E\}\ on F.Cu "F.Cu-/~{WAKE}-8" (solid, remove dead copper, pour order 31825): -118.17,43.506 -118.175,43.428 -118.187,43.372 -118.213,43.307 -118.241,43.243 -118.266,43.149 -118.07,43.109 -117.874,43.149 -117.915,43.281 -117.927,43.307 -117.957,43.386 -117.97,43.506
{\W\A\K\E\}\ on F.Cu "F.Cu-/~{WAKE}-7" (solid, remove dead copper, pour order 31816): -60.196,42.46 -60.118,42.455 -60.062,42.443 -59.997,42.417 -59.933,42.389 -59.839,42.364 -59.799,42.56 -59.839,42.756 -59.971,42.715 -59.997,42.703 -60.076,42.673 -60.196,42.66
+5V on F.Cu "F.Cu-+5V-11" (solid, remove dead copper, pour order 30966): -33.07,15.91 -25.78,15.93 -25.72,13.96 -25.78,13.51 -33.3,13.53 -33.3,13.96 -33.3,15.66
+3V3 on F.Cu "F.Cu-+3V3-69" (solid, remove dead copper, pour order 31646): -91.485,35.88 -91.491,35.81 -91.51,35.726 -91.536,35.667 -91.573,35.618 -91.606,35.593 -91.645,35.579 -91.655,35.577 -91.385,35.339 -91.115,35.577 -91.18,35.603 -91.232,35.663 -91.27,35.761 -91.285,35.88
TMDS_CK- on F.Cu "F.Cu-/HDMI/TMDS_CK--6" (solid, remove dead copper, pour order 32075): -46.087,10.448 -46.092,10.48 -46.1,10.541 -46.09,10.564 -46.065,10.572 -46.19,10.886 -46.315,10.572 -46.295,10.568 -46.284,10.555 -46.281,10.513 -46.288,10.48 -46.293,10.448
GND on F.Cu "F.Cu-GND-164" (solid, remove dead copper, pour order 31801): -20.065,33.794 -20.06,33.875 -20.048,33.932 -20.024,33.994 -19.998,34.058 -19.974,34.151 -20.17,34.191 -20.366,34.151 -20.326,34.023 -20.31,33.991 -20.279,33.913 -20.265,33.794
GND on F.Cu "F.Cu-GND-163" (solid, remove dead copper, pour order 31764): -10.015,39.926 -10.02,39.846 -10.032,39.788 -10.056,39.726 -10.082,39.662 -10.106,39.569 -9.91,39.529 -9.714,39.569 -9.754,39.697 -9.77,39.729 -9.801,39.807 -9.815,39.926
DDI_B_TX1- on F.Cu "F.Cu-/HDMI/DDI_B_TX1-" (solid, remove dead copper, pour order 31467): -42.691,19.683 -42.738,19.595 -42.779,19.55 -42.831,19.51 -42.887,19.48 -42.951,19.459 -43.053,19.45 -42.895,19.169 -42.585,19.142 -42.593,19.243 -42.569,19.399 -42.508,19.612 -42.486,19.683
CON_USB2_D_P on F.Cu "F.Cu-/USB2.0&USB3.0/CON_USB2_D_P-3" (solid, remove dead copper, pour order 32026): -65.279,15.017 -65.279,15.023 -65.27,15.097 -65.247,15.129 -65.202,15.142 -65.25,15.456 -65.375,15.472 -65.387,15.333 -65.417,15.198 -65.439,15.101 -65.449,15.017
TMDS_D2- on F.Cu "F.Cu-/HDMI/TMDS_D2--7" (solid, remove dead copper, pour order 31318): -42.033,8.255 -42.031,8.227 -42.031,8.148 -42.046,8.117 -42.08,8.105 -41.93,6.804 -41.78,8.105 -41.803,8.11 -41.819,8.122 -41.832,8.167 -41.829,8.227 -41.827,8.255
Net-(Q8-G) on F.Cu "F.Cu-Net-(Q8-G)-2" (solid, remove dead copper, pour order 31308): -130.941,89.753 -130.863,89.78 -130.811,89.782 -130.759,89.772 -130.722,89.753 -130.691,89.723 -130.665,89.671 -130.019,89.961 -130.75,90.149 -130.77,90.093 -130.841,90.013 -130.979,89.905 -131.047,89.859
SOC_UART0_RX on F.Cu "F.Cu-/GPIO/SOC_UART0_RX-4" (solid, remove dead copper, pour order 32158): -99.744,82.6 -99.705,82.665 -99.677,82.718 -99.649,82.742 -99.709,83.056 -99.835,83.066 -99.81,82.989 -99.797,82.917 -99.795,82.853 -99.803,82.796 -99.819,82.75 -99.843,82.713 -99.85,82.706
I2C4_SDA on F.Cu "F.Cu-/GPIO/I2C4_SDA-2" (solid, remove dead copper, pour order 32141): -80.975,83.37 -80.975,83.355 -80.979,83.285 -80.994,83.257 -81.025,83.245 -80.9,82.932 -80.775,83.245 -80.796,83.25 -80.811,83.262 -80.825,83.307 -80.825,83.355 -80.825,83.37
I2C4_SDA on F.Cu "F.Cu-/GPIO/I2C4_SDA-1" (solid, remove dead copper, pour order 31071): 23 vertices, not listed, extent -83.196,87.224 -82.034,88.386
Net-(J16-{\W\_\D\I\S\A\B\L\E\1\}\)\ on F.Cu "F.Cu-Net-(J16-~{W_DISABLE1})-1" (solid, remove dead copper, pour order 31669): -108.295,66.36 -108.321,66.358 -108.401,66.359 -108.432,66.375 -108.445,66.41 -109.221,66.26 -108.445,66.11 -108.44,66.133 -108.428,66.149 -108.383,66.163 -108.321,66.162 -108.295,66.16
Net-(U6-CKXTAL2) on F.Cu "F.Cu-Net-(U6-CKXTAL2)-5" (solid, remove dead copper, pour order 32157): -95.385,29.265 -95.354,29.268 -95.286,29.27 -95.256,29.261 -95.236,29.24 -94.884,29.34 -95.235,29.44 -95.267,29.414 -95.327,29.41 -95.353,29.412 -95.385,29.415
GND on F.Cu "F.Cu-GND-162" (solid, remove dead copper, pour order 31804): -8.315,41.994 -8.31,42.075 -8.298,42.132 -8.274,42.194 -8.248,42.258 -8.224,42.351 -8.42,42.391 -8.616,42.351 -8.576,42.223 -8.56,42.191 -8.529,42.113 -8.515,41.994
CON_USB3_SSRX_N on F.Cu "F.Cu-/USB2.0&USB3.0/CON_USB3_SSRX_N-2" (solid, remove dead copper, pour order 32030): -114.059,17.007 -114.059,17.013 -114.05,17.087 -114.027,17.119 -113.982,17.133 -114.03,17.446 -114.155,17.462 -114.167,17.323 -114.197,17.188 -114.219,17.091 -114.229,17.007
Net-(D11-A2) on F.Cu "F.Cu-Net-(D11-A2)-1" (solid, remove dead copper, pour order 31721): -10.04,3.725 -10.038,3.699 -10.039,3.619 -10.055,3.588 -10.09,3.575 -9.94,2.954 -9.79,3.575 -9.813,3.58 -9.829,3.592 -9.843,3.637 -9.842,3.699 -9.84,3.725
TMDS_D2- on F.Cu "F.Cu-/HDMI/TMDS_D2--6" (solid, remove dead copper, pour order 31442): -40.207,14.048 -40.258,14.106 -40.31,14.183 -40.347,14.258 -40.371,14.338 -40.377,14.397 -40.371,14.455 -40.365,14.477 -40.686,14.431 -40.806,14.16 -40.705,14.144 -40.582,14.087 -40.44,13.983 -40.353,13.902
Net-(Q7-G) on F.Cu "F.Cu-Net-(Q7-G)-7" (solid, remove dead copper, pour order 31722): -31.683,7.804 -31.678,7.903 -31.666,7.971 -31.652,8.018 -31.615,8.161 -31.811,8.201 -32.007,8.161 -31.969,8.016 -31.946,7.931 -31.937,7.804
HSIO_3_RX+ on F.Cu "F.Cu-/LattePanda Module/HSIO_3_RX+-2" (solid, remove dead copper, pour order 31911): -77.203,56.139 -77.152,56.134 -77.115,56.121 -77.069,56.077 -77.052,56.052 -77.014,55.998 -76.951,55.943 -76.839,56.109 -76.801,56.305 -76.906,56.321 -76.98,56.323 -77.041,56.318 -77.203,56.309
Net-(D22-A) on F.Cu "F.Cu-Net-(D22-A)-1" (solid, remove dead copper, pour order 31494): -133.178,90.662 -133.09,90.545 -133.045,90.462 -133.009,90.37 -132.987,90.286 -132.977,90.201 -132.98,90.139 -132.709,90.239 -132.631,90.56 -132.728,90.567 -132.852,90.613 -132.995,90.702 -133.072,90.768
CON_USB3_SSTX_N on F.Cu "F.Cu-/USB2.0&USB3.0/CON_USB3_SSTX_N-2" (solid, remove dead copper, pour order 32027): -120.079,17.007 -120.079,17.013 -120.07,17.087 -120.047,17.119 -120.002,17.133 -120.05,17.446 -120.175,17.462 -120.187,17.323 -120.217,17.188 -120.239,17.091 -120.249,17.007
TMDS_CK+ on F.Cu "F.Cu-/HDMI/TMDS_CK+-6" (solid, remove dead copper, pour order 31463): -47.178,17.697 -47.131,17.785 -47.09,17.83 -47.038,17.87 -46.982,17.9 -46.918,17.921 -46.816,17.93 -46.974,18.211 -47.284,18.238 -47.276,18.137 -47.3,17.981 -47.361,17.768 -47.383,17.697
HSIO_0_TX+ on F.Cu "F.Cu-/LattePanda Module/HSIO_0_TX+-2" (solid, remove dead copper, pour order 31936): -79.157,22.141 -79.208,22.146 -79.245,22.159 -79.291,22.203 -79.308,22.228 -79.346,22.282 -79.409,22.337 -79.521,22.171 -79.559,21.975 -79.454,21.959 -79.38,21.957 -79.319,21.962 -79.157,21.971
Net-(D25-A2) on F.Cu "F.Cu-Net-(D25-A2)-4" (solid, remove dead copper, pour order 31113): 19 vertices, not listed, extent -108.55,91.859 -107.049,92.821
HSIO_0_TX- on F.Cu "F.Cu-/LattePanda Module/HSIO_0_TX--2" (solid, remove dead copper, pour order 31914): -119.293,21.699 -119.242,21.694 -119.205,21.681 -119.159,21.637 -119.142,21.612 -119.104,21.558 -119.041,21.503 -118.929,21.669 -118.891,21.865 -118.996,21.881 -119.07,21.883 -119.131,21.878 -119.293,21.869
HSIO_2_RX+ on F.Cu "F.Cu-/LattePanda Module/HSIO_2_RX+-2" (solid, remove dead copper, pour order 31486): -115.545,38.501 -115.546,38.501 -115.587,38.503 -115.637,38.512 -115.678,38.537 -115.69,38.558 -115.695,38.586 -116.471,38.53 -116.48,38.38 -116.163,38.378 -115.853,38.352 -115.545,38.331
CON_USB1_D_N on F.Cu "F.Cu-/USB2.0&USB3.0/CON_USB1_D_N-2" (solid, remove dead copper, pour order 31122): 20 vertices, not listed, extent -66.646,8.616 -65.551,9.64
{\P\W\R\_\L\E\D\}\{\s\l\a\s\h\}\{PSON} on F.Cu "F.Cu-/~{PWR_LED}{slash}~{PSON}-4" (solid, remove dead copper, pour order 31005): 21 vertices, not listed, extent -77.327,14.903 -75.718,16.512
Net-(M1-PWM) on F.Cu "F.Cu-Net-(M1-PWM)-1" (solid, remove dead copper, pour order 31173): 18 vertices, not listed, extent -83.883,77 -82.962,78.291
Net-(Q7-G) on F.Cu "F.Cu-Net-(Q7-G)-6" (solid, remove dead copper, pour order 31839): -30.81,11.994 -30.805,12.072 -30.793,12.128 -30.767,12.193 -30.739,12.257 -30.714,12.351 -30.91,12.391 -31.106,12.351 -31.065,12.219 -31.053,12.193 -31.023,12.114 -31.01,11.994
{\P\L\T\_\R\S\T\}\ on F.Cu "F.Cu-/~{PLT_RST}-7" (solid, remove dead copper, pour order 31131): 21 vertices, not listed, extent -51.096,28.856 -49.859,30.104
GND on F.Cu "F.Cu-GND-161" (solid, remove dead copper, pour order 31762): -69.015,40.266 -69.02,40.186 -69.032,40.128 -69.056,40.066 -69.082,40.002 -69.106,39.909 -68.91,39.869 -68.714,39.909 -68.754,40.037 -68.77,40.069 -68.801,40.147 -68.815,40.266
GND on F.Cu "F.Cu-GND-160" (solid, remove dead copper, pour order 31393): -104.81,47.63 -104.877,47.625 -104.959,47.618 -105.042,47.621 -105.11,47.648 -105.133,47.674 -105.147,47.71 -105.371,47.43 -105.147,47.15 -105.136,47.182 -105.118,47.205 -105.06,47.235 -104.966,47.242 -104.877,47.235 -104.81,47.23
GND on F.Cu "F.Cu-GND-159" (solid, remove dead copper, pour order 31787): -14.065,33.794 -14.06,33.875 -14.048,33.932 -14.024,33.994 -13.998,34.058 -13.974,34.151 -14.17,34.191 -14.366,34.151 -14.326,34.023 -14.31,33.991 -14.279,33.913 -14.265,33.794
CON_USB4_SSTX_N on F.Cu "F.Cu-/USB2.0&USB3.0/CON_USB4_SSTX_N-4" (solid, remove dead copper, pour order 32056): -118.749,17.107 -118.733,16.994 -118.717,16.927 -118.687,16.792 -118.675,16.653 -118.55,16.669 -118.502,16.983 -118.531,16.987 -118.552,17 -118.574,17.042 -118.579,17.102 -118.579,17.107
GND on F.Cu "F.Cu-GND-158" (solid, remove dead copper, pour order 31472): -108.145,13.08 -108.076,13.075 -107.993,13.057 -107.92,13.031 -107.855,12.992 -107.817,12.957 -107.79,12.915 -107.78,12.885 -107.554,13.18 -107.78,13.475 -107.815,13.405 -107.886,13.347 -107.997,13.302 -108.132,13.28 -108.145,13.28
+1V0 on F.Cu "F.Cu-+1V0-16" (solid, remove dead copper, pour order 32013): -93.588,26.074 -93.59,26.057 -93.604,26.047 -93.68,26.041 -93.744,26.039 -93.519,25.769 -93.251,26.009 -93.363,26.044 -93.408,26.073 -93.443,26.106 -93.468,26.142 -93.482,26.178 -93.482,26.18
+1V0 on F.Cu "F.Cu-+1V0-15" (solid, remove dead copper, pour order 32004): -90.635,25.77 -90.63,25.838 -90.618,25.887 -90.592,25.944 -90.564,26.002 -90.539,26.088 -90.735,26.128 -90.931,26.088 -90.893,25.973 -90.878,25.944 -90.848,25.876 -90.835,25.77
GND on F.Cu "F.Cu-GND-157" (solid, remove dead copper, pour order 31797): -21.815,41.994 -21.81,42.075 -21.798,42.132 -21.774,42.194 -21.748,42.258 -21.724,42.351 -21.92,42.391 -22.116,42.351 -22.076,42.223 -22.06,42.191 -22.029,42.113 -22.015,41.994
PCIE30_TX1_N on F.Cu "F.Cu-/PCIe x4/PCIE30_TX1_N" (solid, remove dead copper, pour order 31547): -126.773,32.814 -126.691,32.76 -126.648,32.713 -126.609,32.657 -126.579,32.594 -126.559,32.525 -126.55,32.419 -126.269,32.57 -126.232,32.88 -126.338,32.871 -126.498,32.895 -126.706,32.959 -126.773,32.984
VPullup on F.Cu "F.Cu-VPullup-5" (solid, remove dead copper, pour order 31613): -12.39,46.46 -12.456,46.466 -12.535,46.485 -12.594,46.51 -12.643,46.547 -12.667,46.58 -12.68,46.619 -12.682,46.635 -12.941,46.36 -12.682,46.085 -12.66,46.151 -12.604,46.204 -12.511,46.243 -12.39,46.26
HSIO_3_RX+ on F.Cu "F.Cu-/LattePanda Module/HSIO_3_RX+-1" (solid, remove dead copper, pour order 31968): -63.716,42.177 -63.707,42.339 -63.701,42.438 -63.72,42.579 -63.916,42.541 -64.082,42.429 -64.016,42.357 -63.973,42.328 -63.939,42.304 -63.911,42.276 -63.893,42.236 -63.886,42.177
+12V on F.Cu "F.Cu-+12V-7" (solid, remove dead copper, pour order 31582): -32.9,7.223 -32.906,7.138 -32.927,7.037 -32.953,6.971 -32.991,6.916 -33.022,6.888 -33.06,6.869 -32.8,6.632 -32.54,6.869 -32.602,6.908 -32.652,6.983 -32.688,7.099 -32.7,7.223
TMDS_CK- on F.Cu "F.Cu-/HDMI/TMDS_CK--5" (solid, remove dead copper, pour order 31441): -47.707,14.048 -47.758,14.106 -47.81,14.183 -47.847,14.258 -47.871,14.338 -47.877,14.397 -47.871,14.455 -47.865,14.477 -48.186,14.431 -48.306,14.16 -48.205,14.144 -48.082,14.087 -47.94,13.983 -47.853,13.902
CC2 on F.Cu "F.Cu-/PSU/CC2-4" (solid, remove dead copper, pour order 31729): -8.815,5.454 -8.81,5.541 -8.798,5.602 -8.778,5.659 -8.734,5.811 -8.93,5.851 -9.126,5.811 -9.094,5.677 -9.073,5.586 -9.065,5.454
DDI_B_DDC_SDA on F.Cu "F.Cu-/HDMI/DDI_B_DDC_SDA-3" (solid, remove dead copper, pour order 31627): -52.168,10.923 -52.174,10.849 -52.194,10.762 -52.22,10.705 -52.257,10.657 -52.289,10.634 -52.329,10.621 -52.335,10.62 -52.065,10.382 -51.795,10.62 -51.86,10.646 -51.911,10.706 -51.947,10.803 -51.962,10.923
CC2 on F.Cu "F.Cu-/PSU/CC2-3" (solid, remove dead copper, pour order 31387): -8.64,13.965 -8.634,14.035 -8.611,14.118 -8.586,14.165 -8.551,14.2 -8.521,14.215 -8.485,14.22 -8.74,14.771 -8.995,14.22 -8.961,14.215 -8.932,14.202 -8.885,14.151 -8.852,14.064 -8.84,13.965
I2C5_SCL on F.Cu "F.Cu-/GPIO/I2C5_SCL-2" (solid, remove dead copper, pour order 32118): -84.325,82.495 -84.325,82.51 -84.321,82.58 -84.306,82.608 -84.275,82.62 -84.4,82.933 -84.525,82.62 -84.504,82.615 -84.489,82.603 -84.475,82.558 -84.475,82.51 -84.475,82.495
HSIO_2_RX- on F.Cu "F.Cu-/LattePanda Module/HSIO_2_RX--1" (solid, remove dead copper, pour order 31913): -98.387,43.001 -98.438,43.006 -98.475,43.019 -98.521,43.063 -98.538,43.088 -98.576,43.142 -98.639,43.197 -98.751,43.031 -98.789,42.835 -98.684,42.819 -98.61,42.817 -98.549,42.822 -98.387,42.831
Net-(U15-FB) on F.Cu "F.Cu-Net-(U15-FB)-2" (solid, remove dead copper, pour order 31380): -21.83,21.41 -21.913,21.403 -22.004,21.395 -22.097,21.398 -22.178,21.422 -22.211,21.446 -22.235,21.48 -22.421,21.21 -22.235,20.94 -22.189,20.992 -22.115,21.02 -22.001,21.024 -21.913,21.017 -21.83,21.01